# Altium PCB CW308T_S6LX9.PcbDoc
Units mil, origin at the board's own origin, x right, y up, seen from the top; angles counter-clockwise.
Board outline 2060 x 2540 mil, 4 copper layers (Component Side, Ground Plane, Power Plane, Solder Side), stack 33.234 mil thick; 42 components, 46 nets, 324 pads, 120 vias.
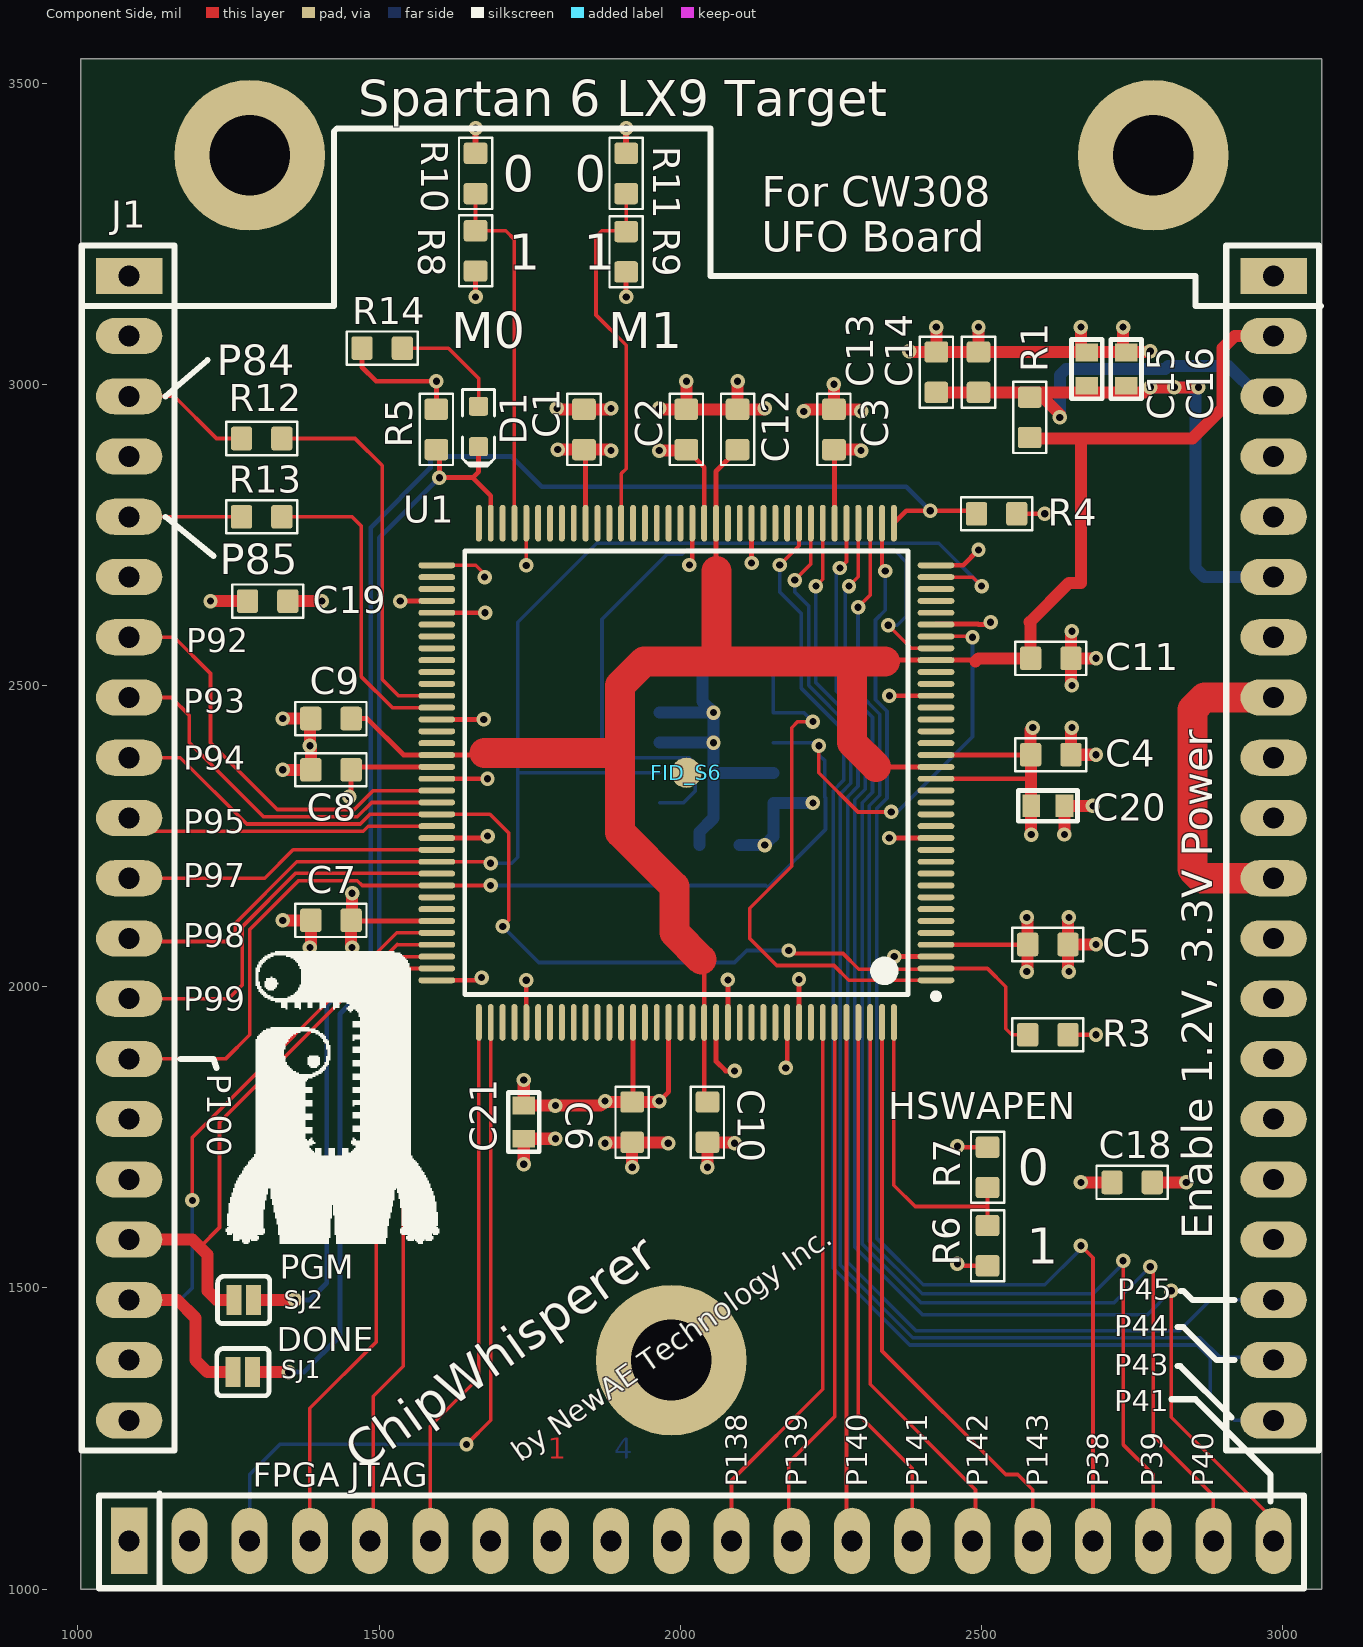
[diagram p0: Component Side view]
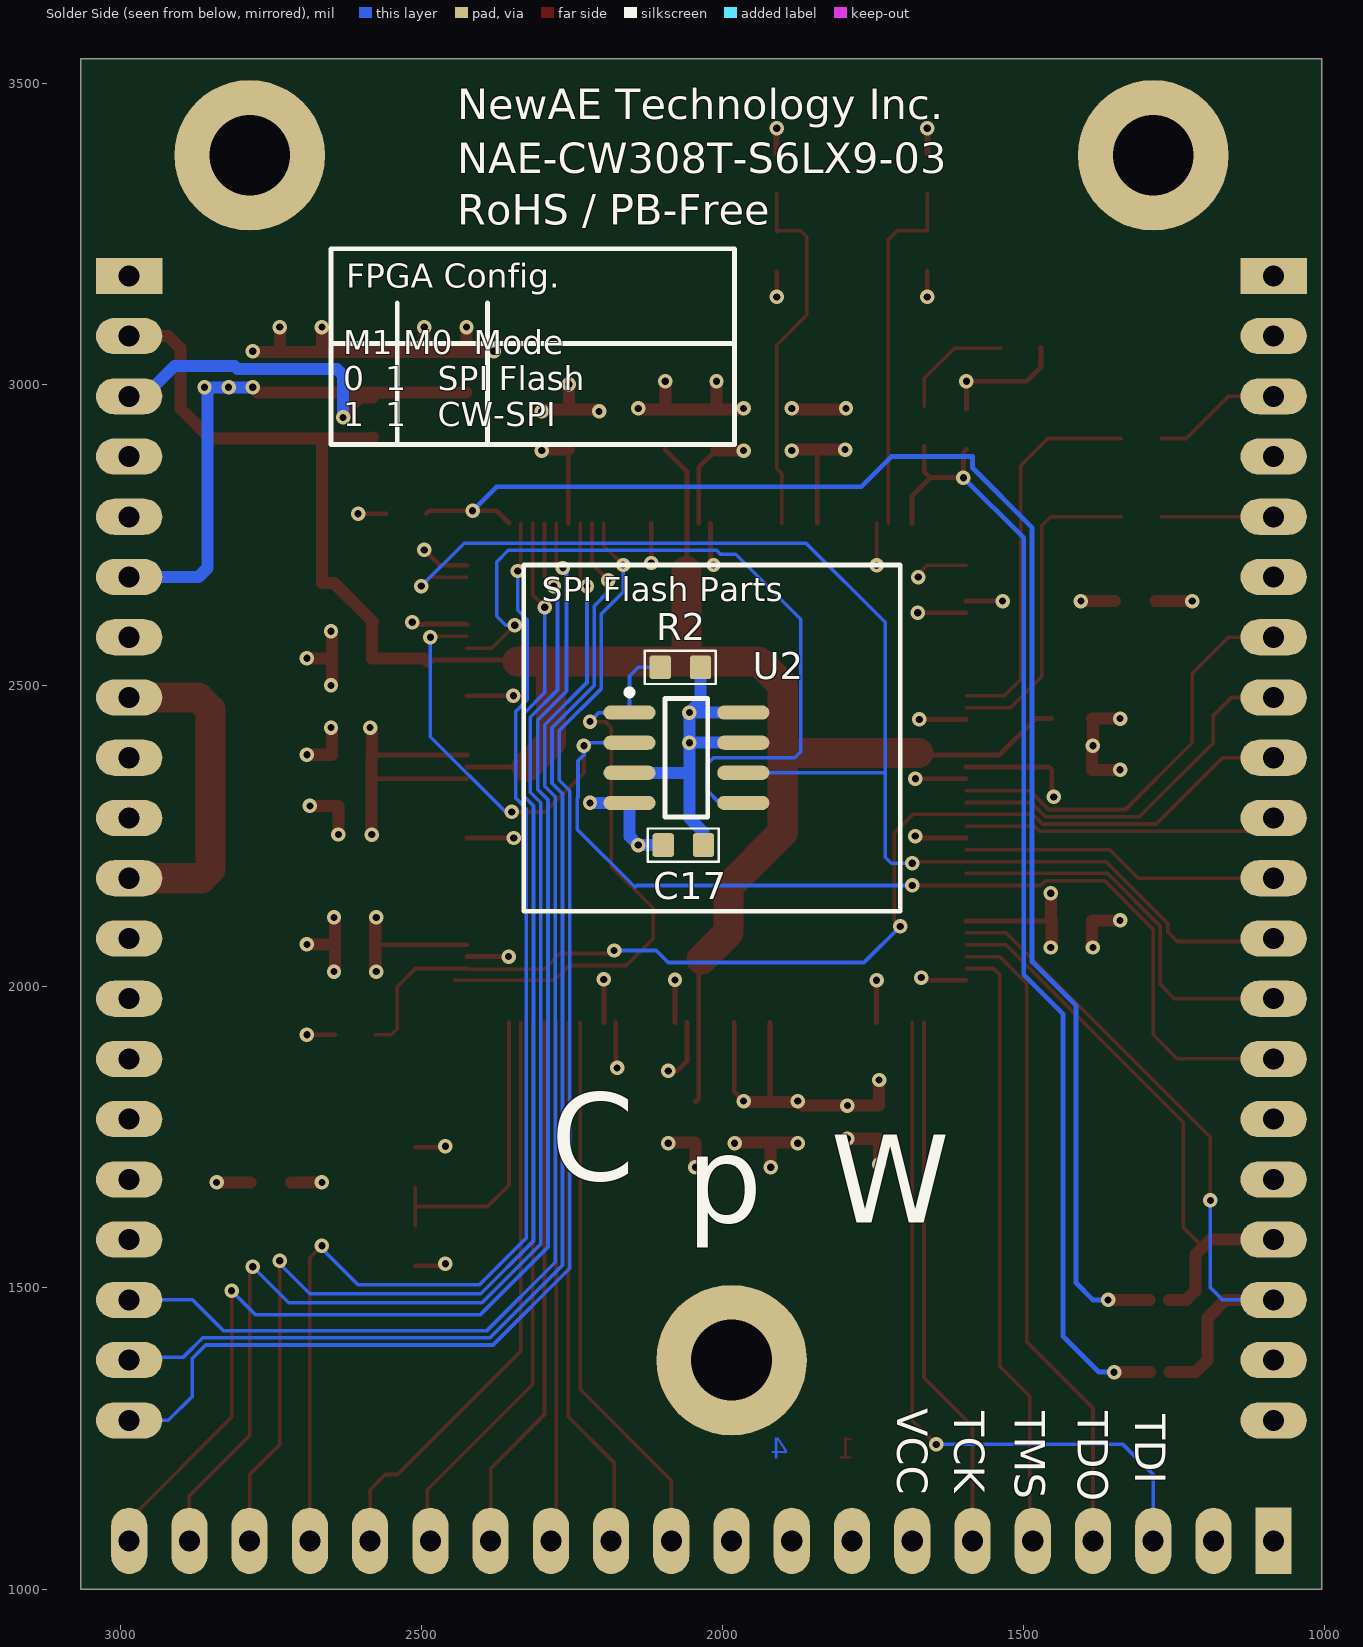
[diagram p1: Solder Side view, seen from below]
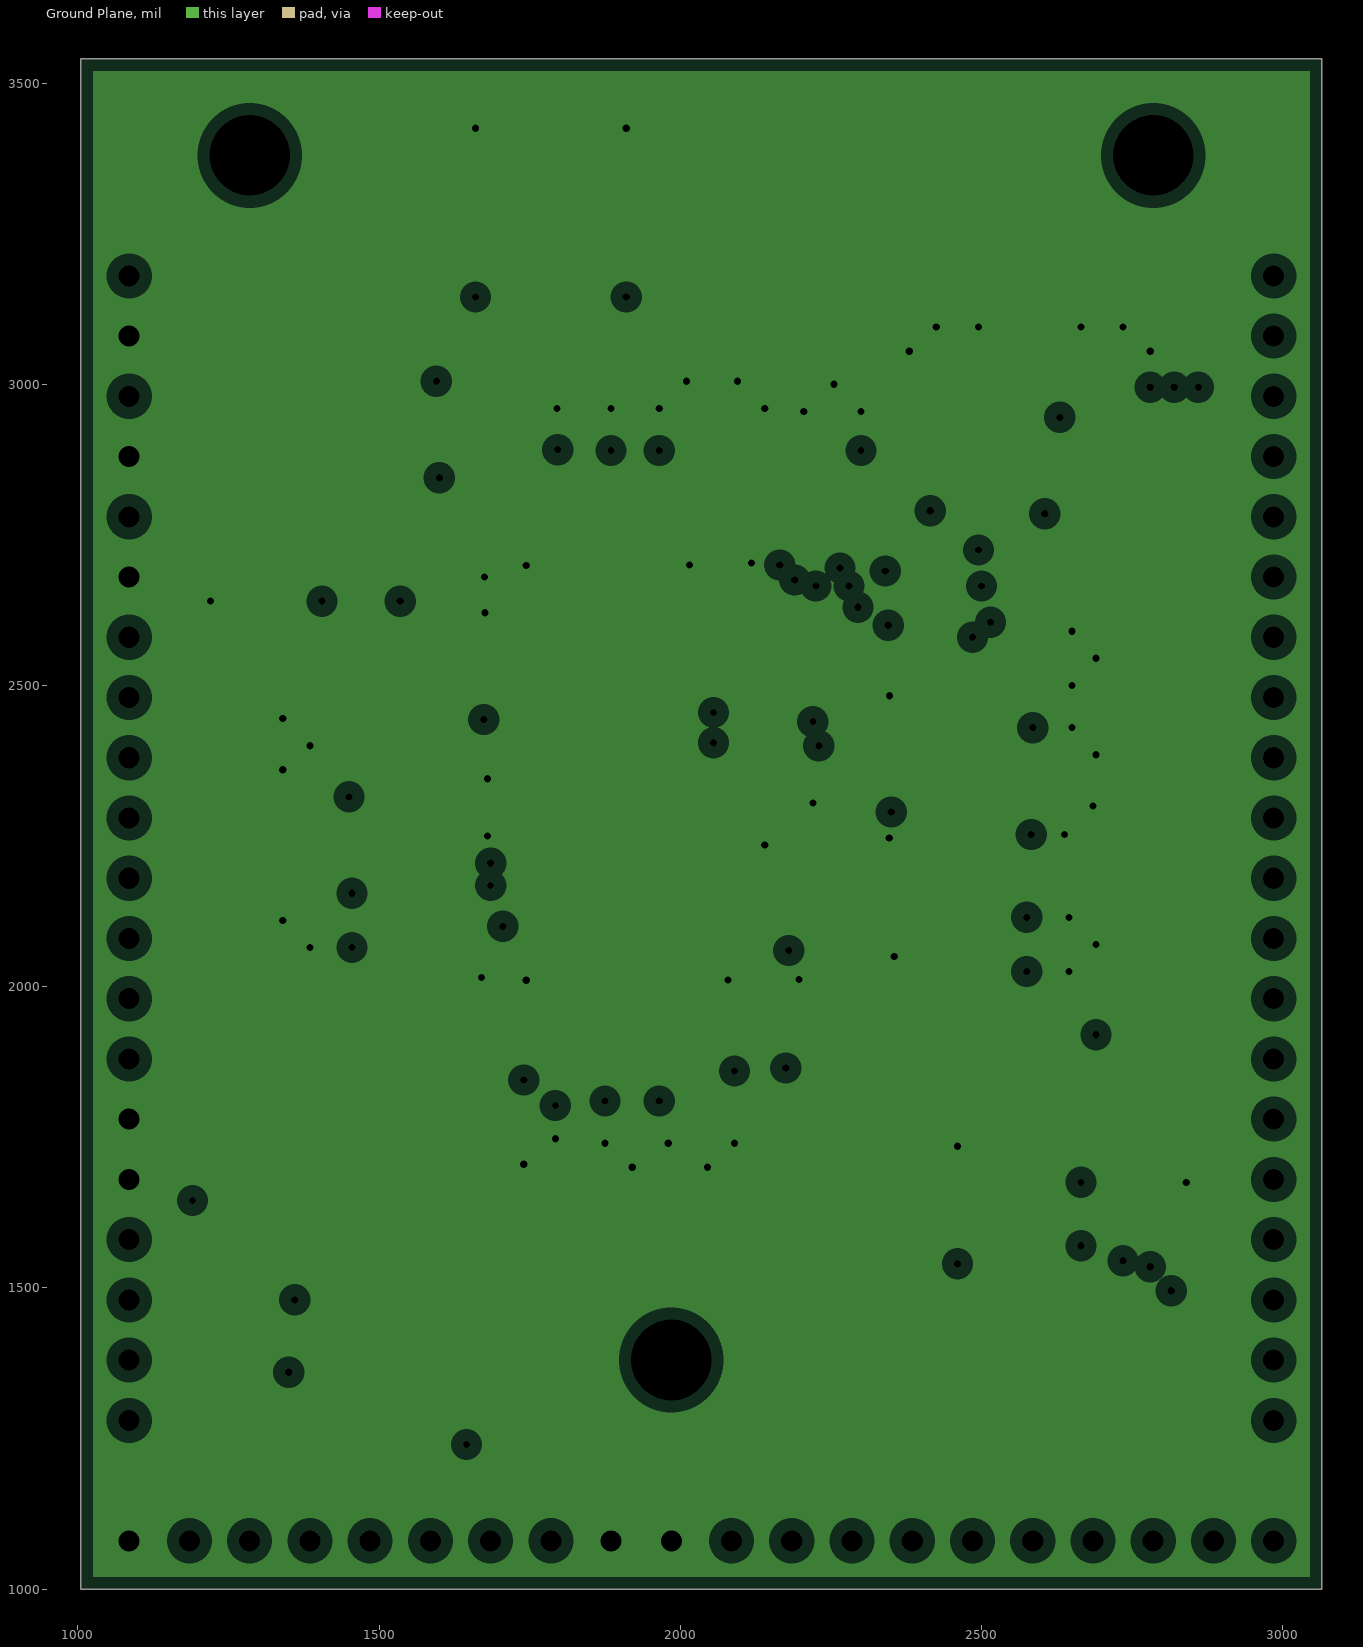
[diagram p2: Ground Plane, clearances drawn from the general rule]
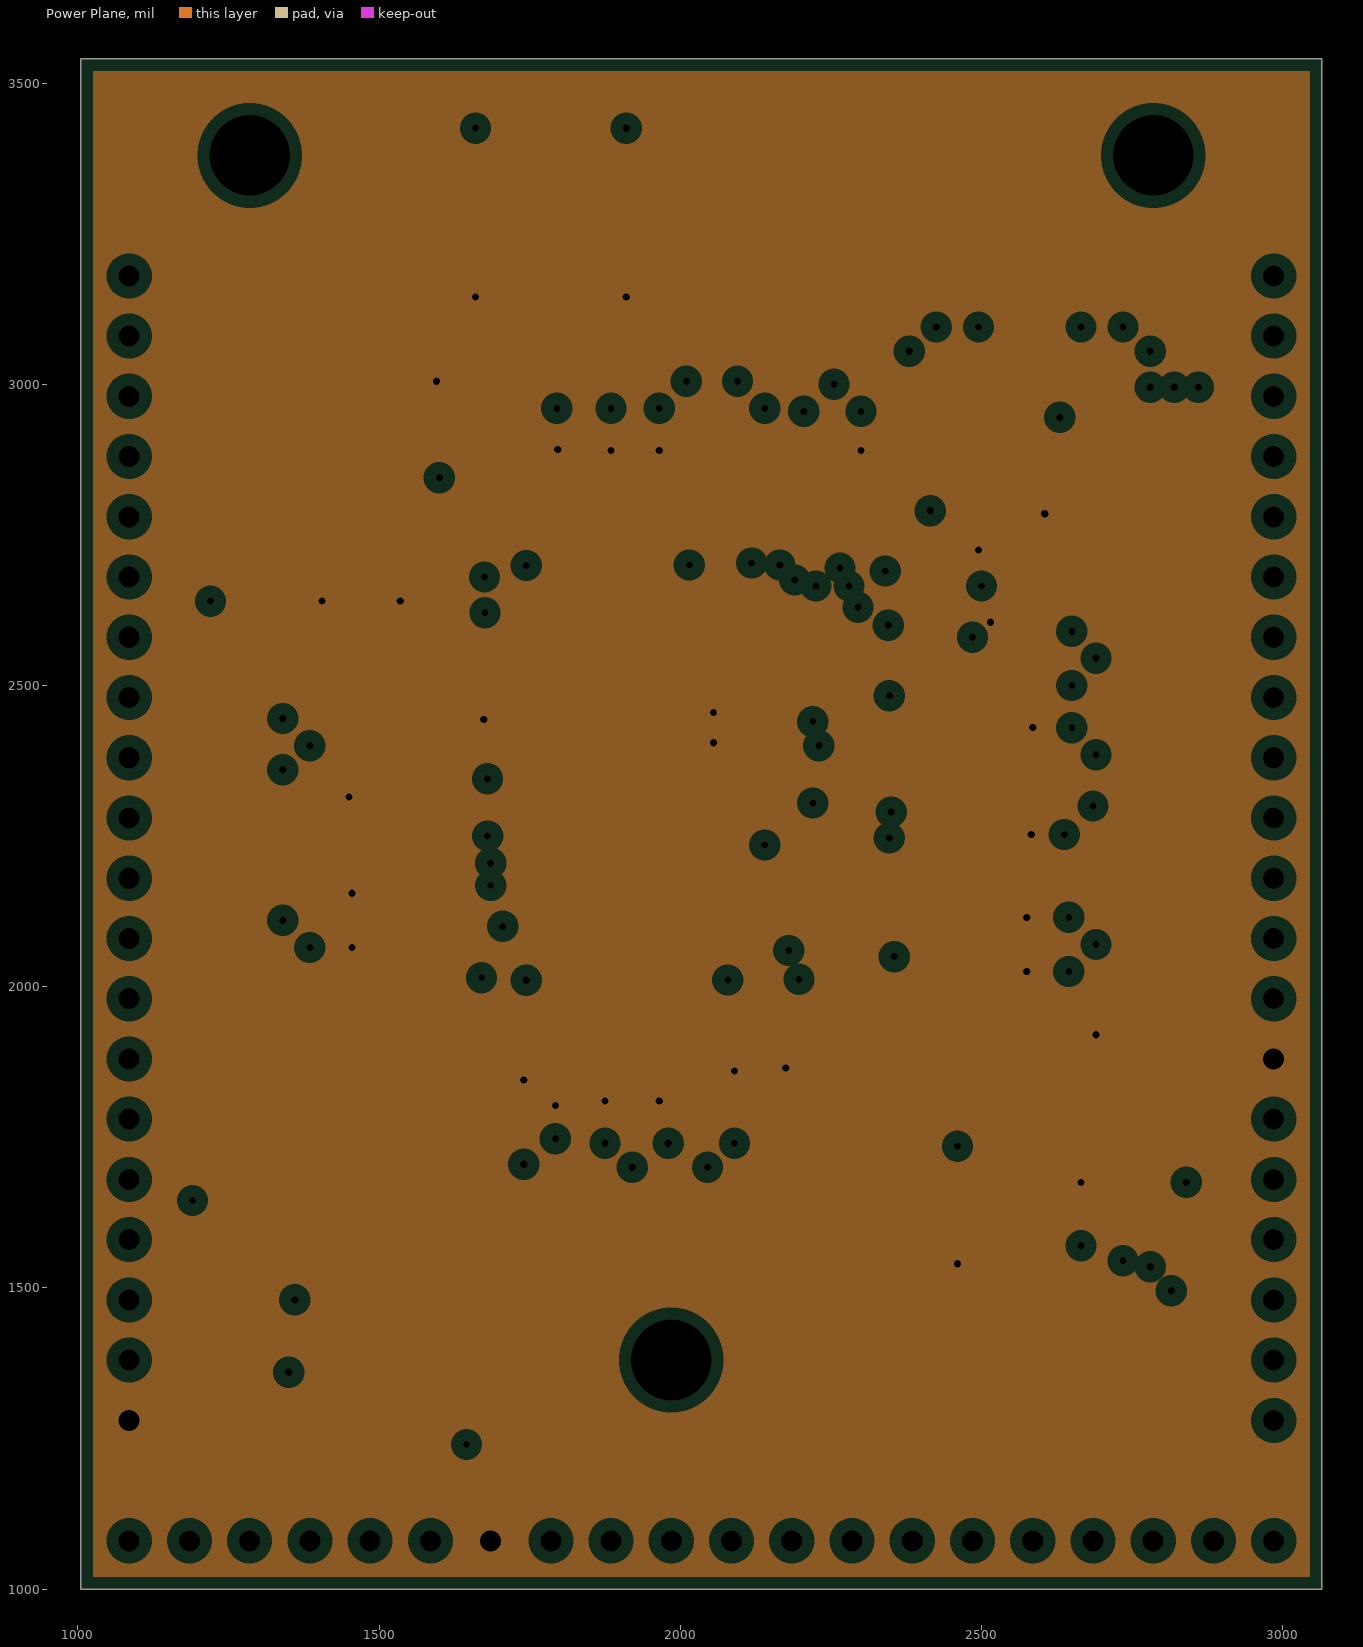
[diagram p3: Power Plane, clearances drawn from the general rule]

## Layer stack, top to bottom
Top Solder: solder mask 0.4, Solder Resist, Dk 3.5
Component Side: signal copper 1.4
Dielectric 1: core 12.6, FR-4, Dk 4.8
Ground Plane: plane copper 1.417, net GND
Dielectric 3: prepreg 5, Dk 4.2
Power Plane: plane copper 1.417, net VCC
Dielectric 4: core 10, Dk 4.2
Solder Side: signal copper 1.4
Bottom Solder: solder mask 0.4, Solder Resist, Dk 3.5

## Board outline
1005,1000 3065,1000 3065,3540 1005,3540

## Design rules (kind name [scope] priority, off if disabled: settings)
Clearance [All] p1: gap=6 ignorepadtopadclearanceinfootprint=FALSE except(0: Arc-Hole Track-Hole SMDPad-Hole THPad-Hole Via-Hole Fill-Hole Poly-Hole Region-Hole Text-Hole)
PasteMaskExpansion PasteMaskExpansion_1 [InComponent('U1')] p1: expansion=-1.5
PasteMaskExpansion [All] p2: expansion=0
PlaneClearance [All] p1: clearance=20
PlaneConnect [All] p1: planeconnectstyle=Relief reliefexpansion=20 reliefentries=4 reliefconductorwidth=10 reliefairgap=10
PolygonConnect [All] p1: connectstyle=Relief reliefconductorwidth=10 reliefentries=4 polygonreliefangle="90 Angle" airgapwidth=10
RoutingVias [All] p1: holewidth=12 width=24 viastyle="Through Hole" minholewidth=12 minwidth=24 maxholewidth=50 maxwidth=100
SolderMaskExpansion [All] p1: expansion=4
Width [All] p1: maxlimit=150 minlimit=6 preferedwidth=8 minimp=50.000000 maximp=50.000000 favimp=50.000000
27 further rules are at their usual default settings.

## Classes and differential pairs
component class CW308T_S6LX9_Connector: J1 R12 R13
component class CW308T_S6LX9_FPGAIO: C17 R2 R3 R6 R7 R8 R9 R10 R11 U1 U2
component class CW308T_S6LX9_FPGAMisc: C1 C2 C3 C4 C5 C6 C7 C8 C9 C10 C11 C12 C13 C14 C15 C16 C18 C19 C20 C21 D1 R1 R4 R5 R14 SJ1 SJ2

## Components (designator, comment, footprint, x,y, rotation, side; value= is the part's Value field where it differs from the comment)
C1 "approved sub OK" CAPC1608X90N 1840,2925 r90 top value=100n
C2 "approved sub OK" CAPC1608X90N 2010,2925 r90 top value=100n
C3 "approved sub OK" CAPC1608X90N 2255,2925 r90 top value=100n
C4 "approved sub OK" CAPC1608X90N 2615,2385 r0 top value=100n
C5 "approved sub OK" CAPC1608X90N 2610,2070 r0 top value=100n
C6 "approved sub OK" CAPC1608X90N 1920,1775 r270 top value=100n
C7 "approved sub OK" CAPC1608X90N 1420,2110 r180 top value=100n
C8 "approved sub OK" CAPC1608X90N 1420,2360 r180 top value=100n
C9 "approved sub OK" CAPC1608X90N 1420,2445 r180 top value=DNM
C10 "approved sub OK" CAPC1608X90N 2045,1775 r270 top value=DNM
C11 "approved sub OK" CAPC1608X90N 2615,2545 r0 top value=DNM
C12 "approved sub OK" CAPC1608X90N 2095,2925 r90 top value=DNM
C13 "approved sub OK" CAPC1608X90N 2495,3020 r90 top value=100n
C14 "approved sub OK" CAPC1608X90N 2425,3020 r90 top value=100n
C15 "2u2" CAPC0603_M 2675,3025 r90 top
C16 "2u2" CAPC0603_M 2740,3025 r90 top
C17 "approved sub OK" CAPC1608X90N 2065,2235 r0 bottom value=100n
C18 "approved sub OK" CAPC1608X90N 2750,1675 r0 top value=100n
C19 "approved sub OK" CAPC1608X90N 1315,2640 r180 top value=100n
C20 "2u2" CAPC0603_M 2610,2300 r0 top
C21 "2u2" CAPC0603_M 1740,1775 r270 top
D1 "LED, 0603, Red" LED-0603-RED 1665,2930 r270 top
FID_S6 "Comment" FIDU-ROUND-1.0mm 2050,2375 r0 top
J1 "CW308_TARGETCON" CW308_TBOARD_CONN 1085,3180 r0 top locked
R1 "Thick Film" RESC1608X55N 2580,2945 r90 top value=3R3
R2 "Thick Film" RESC1608X55N 2070,2530 r0 bottom value=1K
R3 "Thick Film" RESC1608X55N 2610,1920 r180 top value=1K
R4 "Thick Film" RESC1608X55N 2525,2785 r180 top value=1K
R5 "Thick Film" RESC1608X55N 1595,2925 r270 top value=1K
R6 "Thick Film" RESC1608X55N 2510,1570 r90 top value=1K
R7 "Thick Film" RESC1608X55N 2510,1700 r90 top value=1K
R8 "Thick Film" RESC1608X55N 1660,3221.54 r270 top value=1K
R9 "Thick Film" RESC1608X55N 1910,3220 r270 top value=1K
R10 "Thick Film" RESC1608X55N 1660,3350 r270 top value=1K
R11 "Thick Film" RESC1608X55N 1910,3350 r270 top value=1K
R12 "Thick Film" RESC1608X55N 1305,2910 r180 top value=51R
R13 "Thick Film" RESC1608X55N 1305,2780 r180 top value=51R
R14 "330R" RESC1608X55N 1505,3060 r180 top
SJ1 "NC" SJ_2S_NC 1273.78,1360 r0 top
SJ2 "NC" SJ_2S_NC 1275,1480 r0 top
U1 "XC6SLX9-3TQG144" TQG144_L 2010,2355 r180 top
U2 "SST25VF040B-50-4C-SAF-T" MCHP-SOIC-SA8_N 2060,2380 r180 bottom

## Footprints (in the part's own frame and the unit in brackets; to place one, negate y for a bottom-side part, rotate by r counter-clockwise, add the part's x,y. Pads: shape width x height; smd on the part's side, far side on the other; paste and mask are expansions set on the pad)
CAPC0603_M [mm]
  rect 0.75x0.95 smd: 1(-0.7,0) 2(0.7,0)
  silkscreen extent -1.25,-0.65 1.25,0.65, body extent -0.85,-0.45 0.85,0.45, height 0.9
CAPC1608X90N [mm] "Chip Capacitor, Body 1.6x0.8mm, EIA 0603, IPC Medium Density"
  round 0.254 on Mech15: 0(0,0)
  rrect25% 0.9x1 smd: 1(-0.85,0) 2(0.85,0)
  Component Side pour cut-out: -0.6,0.5 -0.4,0.7 0.4,0.7 0.6,0.5 0.6,-0.5 0.4,-0.7 -0.4,-0.7 -0.6,-0.5
  silkscreen extent -1.5,-0.7 1.5,0.7, body extent -0.85,-0.45 0.85,0.45, height 0.89
CW308_TBOARD_CONN [mil]
  rect 110x60 hole 35: A1(0,0) C1(1900,0)
  oval 110x60 hole 35: A2(0,-100) A3(0,-200) A4(0,-300) A5(0,-400) A6(0,-500) A7(0,-600) A8(0,-700) A9(0,-800) A10(0,-900) A11(0,-1000) A12(0,-1100) A13(0,-1200) A14(0,-1300) A15(0,-1400) A16(0,-1500) A17(0,-1600) A18(0,-1700) A19(0,-1800) A20(0,-1900) C2(1900,-100) C3(1900,-200) C4(1900,-300) C5(1900,-400) C6(1900,-500) C7(1900,-600) C8(1900,-700) C9(1900,-800) C10(1900,-900) C11(1900,-1000) C12(1900,-1100) C13(1900,-1200) C14(1900,-1300) C15(1900,-1400) C16(1900,-1500) C17(1900,-1600) C18(1900,-1700) C19(1900,-1800) C20(1900,-1900)
  rect 60x110 hole 35: B1(0,-2100)
  oval 60x110 hole 35: B2(100,-2100) B3(200,-2100) B4(300,-2100) B5(400,-2100) B6(500,-2100) B7(600,-2100) B8(700,-2100) B9(800,-2100) B10(900,-2100) B11(1000,-2100) B12(1100,-2100) B13(1200,-2100) B14(1300,-2100) B15(1400,-2100) B16(1500,-2100) B17(1600,-2100) B18(1700,-2100) B19(1800,-2100) B20(1900,-2100)
  round 250 hole 134: MH1(200,200) MH2(900,-1800) MH2(1700,200)
  silkscreen extent -79,-2179 1979,50, body extent -50,-2150 1950,50, height 224
FIDU-ROUND-1.0mm [mil]
  round 50 smd paste-78.74 mask+27.56: M1(-40,-20)
LED-0603-RED [mm]
  round 0.254 on Mech15: 0(0,0)
  rrect25% 0.8x0.8 smd: A(-0.85,0) K(0.85,0)
  Component Side pour cut-out: -0.5,0.5 0.5,0.5 0.5,-0.5 -0.5,-0.5
  silkscreen extent -1.55,-0.67 1.68,0.67, body extent -0.8,-0.4 0.8,0.4, height 0.75
MCHP-SOIC-SA8_N [mm] "SOIC, 8-Leads, Body 4.9x3.9mm, Pitch 1.27mm, IPC Medium Density"
  oval 2.2x0.6 smd: 1(-2.4,1.905) 2(-2.4,0.635) 3(-2.4,-0.635) 4(-2.4,-1.905) 5(2.4,-1.905) 6(2.4,-0.635) 7(2.4,0.635) 8(2.4,1.905)
  silkscreen extent -2.53,-2.5 0.9,2.88, body extent -2,-2.5 2,2.5, height 1.75
RESC1608X55N [mm] "Chip Resistor, Body 1.6x0.8mm, EIA 0603, IPC Medium Density"
  round 0.254 on Mech15: 0(0,0)
  rrect25% 0.9x1 smd: 1(-0.85,0) 2(0.85,0)
  Component Side pour cut-out: -0.6,0.5 -0.4,0.7 0.4,0.7 0.6,0.5 0.6,-0.5 0.4,-0.7 -0.4,-0.7 -0.6,-0.5
  silkscreen extent -1.5,-0.7 1.5,0.7, body extent -0.87,-0.47 0.88,0.48, height 0.54
SJ_2S_NC [mil] "Solder Jumper, closed with solder paste"
  rect 25x50 smd: 1(-16.22,0) 2(16.22,0)
  silkscreen extent -43,-39 43,39
TQG144_L [mm] "Thin QFP, 144-Leads, Body 20x20mm, Pitch 0.5mm, IPC High Density"
  oval 1.55x0.25 smd: 1(-10.525,8.75) 2(-10.525,8.25) 3(-10.525,7.75) 4(-10.525,7.25) 5(-10.525,6.75) 6(-10.525,6.25) 7(-10.525,5.75) 8(-10.525,5.25) 9(-10.525,4.75) 10(-10.525,4.25) 11(-10.525,3.75) 12(-10.525,3.25) 13(-10.525,2.75) 14(-10.525,2.25) 15(-10.525,1.75) 16(-10.525,1.25) 17(-10.525,0.75) 18(-10.525,0.25) 19(-10.525,-0.25) 20(-10.525,-0.75) 21(-10.525,-1.25) 22(-10.525,-1.75) 23(-10.525,-2.25) 24(-10.525,-2.75) 25(-10.525,-3.25) 26(-10.525,-3.75) 27(-10.525,-4.25) 28(-10.525,-4.75) 29(-10.525,-5.25) 30(-10.525,-5.75) 31(-10.525,-6.25) 32(-10.525,-6.75) 33(-10.525,-7.25) 34(-10.525,-7.75) 35(-10.525,-8.25) 36(-10.525,-8.75) 73(10.525,-8.75) 74(10.525,-8.25) 75(10.525,-7.75) 76(10.525,-7.25) 77(10.525,-6.75) 78(10.525,-6.25) 79(10.525,-5.75) 80(10.525,-5.25) 81(10.525,-4.75) 82(10.525,-4.25) 83(10.525,-3.75) 84(10.525,-3.25) 85(10.525,-2.75) 86(10.525,-2.25) 87(10.525,-1.75) 88(10.525,-1.25) 89(10.525,-0.75) 90(10.525,-0.25) 91(10.525,0.25) 92(10.525,0.75) 93(10.525,1.25) 94(10.525,1.75) 95(10.525,2.25) 96(10.525,2.75) 97(10.525,3.25) 98(10.525,3.75) 99(10.525,4.25) 100(10.525,4.75) 101(10.525,5.25) 102(10.525,5.75) 103(10.525,6.25) 104(10.525,6.75) 105(10.525,7.25) 106(10.525,7.75) 107(10.525,8.25) 108(10.525,8.75)
  oval 0.25x1.55 smd: 37(-8.75,-10.525) 38(-8.25,-10.525) 39(-7.75,-10.525) 40(-7.25,-10.525) 41(-6.75,-10.525) 42(-6.25,-10.525) 43(-5.75,-10.525) 44(-5.25,-10.525) 45(-4.75,-10.525) 46(-4.25,-10.525) 47(-3.75,-10.525) 48(-3.25,-10.525) 49(-2.75,-10.525) 50(-2.25,-10.525) 51(-1.75,-10.525) 52(-1.25,-10.525) 53(-0.75,-10.525) 54(-0.25,-10.525) 55(0.25,-10.525) 56(0.75,-10.525) 57(1.25,-10.525) 58(1.75,-10.525) 59(2.25,-10.525) 60(2.75,-10.525) 61(3.25,-10.525) 62(3.75,-10.525) 63(4.25,-10.525) 64(4.75,-10.525) 65(5.25,-10.525) 66(5.75,-10.525) 67(6.25,-10.525) 68(6.75,-10.525) 69(7.25,-10.525) 70(7.75,-10.525) 71(8.25,-10.525) 72(8.75,-10.525) 109(8.75,10.525) 110(8.25,10.525) 111(7.75,10.525) 112(7.25,10.525) 113(6.75,10.525) 114(6.25,10.525) 115(5.75,10.525) 116(5.25,10.525) 117(4.75,10.525) 118(4.25,10.525) 119(3.75,10.525) 120(3.25,10.525) 121(2.75,10.525) 122(2.25,10.525) 123(1.75,10.525) 124(1.25,10.525) 125(0.75,10.525) 126(0.25,10.525) 127(-0.25,10.525) 128(-0.75,10.525) 129(-1.25,10.525) 130(-1.75,10.525) 131(-2.25,10.525) 132(-2.75,10.525) 133(-3.25,10.525) 134(-3.75,10.525) 135(-4.25,10.525) 136(-4.75,10.525) 137(-5.25,10.525) 138(-5.75,10.525) 139(-6.25,10.525) 140(-6.75,10.525) 141(-7.25,10.525) 142(-7.75,10.525) 143(-8.25,10.525) 144(-8.75,10.525)
  silkscreen extent -10.65,-9.35 9.35,9.55, body extent -10,-10 10,10, height 1.6

## Part data
C1 C2 C3 C4 C5 C6 C7 C8 C9 C10 C11 C12 C13 C14 C17 C18 C19: library part CAPC_100n_0603_X7R_50V_10%, "Capacitor SMD Cer 100nF 10% 50V X7R 0603", Manufacturer 1="AVX Corporation", Manufacturer 2="TDK Corporation", Manufacturer Part Number 1=06035C104KAT2A, Manufacturer Part Number 2=C1608X7R1H104K, Package / Case="0603 (1608 Metric)", Ratings="50V; X7R", Supplier Part Number 1=478-5052-1-ND, Tolerance=±10%, ComponentLink1Description=http://www.avx.com/docs/Catalogs/cx7r.pdf, ComponentLink1URL=http://www.avx.com/docs/Catalogs/cx7r.pdf, ComponentLink2Description=http://product.tdk.com/capacitor/mlcc/en/documents/mlcc_commercial_general_en.pdf, ComponentLink2URL=http://product.tdk.com/capacitor/mlcc/en/documents/mlcc_commercial_general_en.pdf, Material=ceramic, SCDType=spec, Supplier 1=Digi-Key, Supplier 2=Digi-Key, Supplier Part Number 2=445-1314-1-ND
C15 C16 C20 C21: library part CCHIP-2u2-0603, "2u2, 0603", Case-EIA=0603, Case-Metric=1608, Component Group=Capacitor, Component Type=Standard, Mounting Technology=SMT, Part Number=CCHIP-2u2-0603, Pin Count=2
D1: library part LEDCHIP_0603_RED, "Chip LED, Red", Component Group=Optical, Component Type=Standard, Mounting Technology=SMT, Part Number=LEDCHIP_0603_RED, Pin Count=2
FID_S6: library part FIDU-ROUND-1.0MM
J1: library part CW308_TBOARD, "CW308 \"Standard\" Target Board Connector"
R1: library part RES_3R3_0603_5%, "Resistor SMD chip 3.3 Ohm 0.1W 5% 0603", Manufacturer 1=Yageo, Manufacturer Part Number 1=RC0603JR-073R3L, Package / Case="0603 (1608 metric)", Ratings="1/10 W", Supplier Part Number 1=311-3.3GRCT-ND, Tolerance=±5%, ComponentLink1Description=http://www.yageo.com/documents/recent/PYu-RC0603_51_RoHS_L_4.pdf, ComponentLink1URL=http://www.yageo.com/documents/recent/PYu-RC0603_51_RoHS_L_4.pdf, SCDType=spec, Supplier 1=Digi-Key
R2 R3 R4 R5 R6 R7 R8 R9 R10 R11: library part RES_1K_0603_5%, "Resistor SMD chip 1k Ohm 0.1W 5% 0603", Manufacturer 1=Yageo, Manufacturer 2="Vishay Dale", Manufacturer Part Number 1=RC0603JR-071KL, Manufacturer Part Number 2=CRCW06031K00JNEA, Package / Case="0603 (1608 metric)", Ratings="1/10 W", Supplier Part Number 1=311-1.0KGRCT-ND, Tolerance=±5%, ComponentLink1Description=http://www.yageo.com/documents/recent/PYu-RC0603_51_RoHS_L_4.pdf, ComponentLink1URL=http://www.yageo.com/documents/recent/PYu-RC0603_51_RoHS_L_4.pdf, ComponentLink2Description=http://www.vishay.com/doc?20008, ComponentLink2URL=http://www.vishay.com/doc?20008, Material="Thick Film", SCDType=spec, Supplier 1=Digi-Key, Supplier 2=Digi-Key, Supplier Part Number 2=541-1.0KGCT-ND
R12 R13: library part RES_51R_0603_1%, "Resistor SMD chip 51 Ohm 0.1W 1% 0603", Manufacturer 1=Yageo, Manufacturer Part Number 1=RC0603FR-0751RL, Package / Case="0603 (1608 metric)", Ratings="1/10 W", Supplier Part Number 1=311-51.0HRCT-ND, Tolerance=±1%, Material="Thick Film", SCDType=spec, Supplier 1=Digi-Key
R14: library part RCHIP-330R-0603, "330R res, 0603, 1%, 1/10W", Case-EIA=0603, Case-Metric=1608, Manufacture 1=Yageo, Manufacture Part Number 1=RC0603FR-07330RL, Rated Power=0.1W, Rated Voltage=75VDC, Supplier Part Number 1=311-330HRCT-ND, Temperature Range="-55C to 155C", Tolerance=1%, Component Group=Resistor, Component Type=Standard, Mounting Technology=SMT, Part Number=RCHIP-330R-0603, Pin Count=2, Supplier 1=Digi-Key
SJ1 SJ2: library part SJ_2S, "Solder Jumper, NC"
U1: library part CMP-0068-00084-1, "Spartan-6 LX 1.0V FPGA, 102 User I/Os, 144-Pin TQFP (0.5mm Pitch), Low Power Version, Commercial Grade, Pb-Free", Code_JEDEC=MS-026-BFB, DatasheetVersion="ver1.6, Nov-2010", PackageDescription="144-Pin Thin Quad Flat Pack (TQG144) - Pb-Free", PackageReference=TQG144, PackageVersion="ver1.2, Jun-2004", PartId=1
U2: library part CMP-0378-00095-1, "4 Mbit SPI Serial Flash, 2.7 to 3.6 V, 50 MHz, 0 to 70 degC, 8-pin SOIC (SA8), Tape and Reel", Manufacturer=Microchip, Code_JEDEC=MS-012, ComponentLink1Description="Manufacturer URL", ComponentLink1URL=http://www.microchip.com, ComponentLink2Description=Datasheet, ComponentLink2URL=http://ww1.microchip.com/downloads/en/DeviceDoc/25051A.pdf, ComponentLink3Description="Package Specification", ComponentLink3URL=http://ww1.microchip.com/downloads/en/DeviceDoc/25080A.pdf, ComponentLink4Description="Product URL", ComponentLink4URL=http://www.microchip.com/SST25VF040B, DatasheetVersion="Rev. A", Mounting Technology="Surface Mount", PackageDescription="8-Lead Plastic Small Outline, 4.9 x 3.9 mm Body, 1.27 mm Pitch", PackageReference=SOIC-SA8, PackageVersion="Rev. A", PartNumber=SST25VF040B-50-4C-SAF-T

## Via types
v1: diameter 24, hole 12, Component Side to Solder Side, tented both sides, 120 vias

## Nets (pads, with @x,y where several pads share a name; then routed paths per layer and width w, separated by ;. In a path a pad name is that pad's centre, name@x,y a point inside that pad or via, vN(x,y) a via of type N, cw(c..) or ccw(c..) an arc to the next point about the centre after c; other vN are vias at no path point)
CLKIN: R13.1 U1.85 | length 534.8
  Component Side w6: R13.1 1455,2780 1470,2765 1470,2515 1521.73,2463.27 U1.85
CLKOUT: R12.1 U1.84 | length 642
  Component Side w6: R12.1 1460,2910 1505,2865 1505,2510 1532.05,2482.95 U1.84
DONE: J1.A18 SJ1.1 U1.104 | length 1172.7
  Component Side w6: v1(1190,1645) 1190,1750 1529.25,2089.25 U1.104
  Component Side w20: J1.A18 1165,1480 1195,1450 1195,1380 1215,1360 SJ1.1
  Solder Side w6: J1.A18 1170,1480 1190,1500 v1(1190,1645)
GND: C1.2 C2.2 C3.2 C4.2 C5.2 C6.2 C7.2 C8.2 C9.2 C10.2 C11.2 C12.2 C13.2 C14.2 C15.2 C16.2 C17.2 C18.2 C19.2 C20.2 C21.2 J1.A2 J1.A4 J1.A6 J1.A15 J1.A16 J1.B1 J1.B9 J1.B10 R7.2 R10.1 R11.1 U1.3 U1.13 U1.25 U1.49 U1.54 U1.68 U1.73 U1.77 U1.91 U1.96 U1.108 U1.113 U1.130 U1.136 U2.4 | length 3623.9
  Component Side w6: U1.73 1660.51,2699.49 1680,2680 v1(1675,2680) ; v1(1744.25,2699.25) U1.68
  Component Side w8: U1.108 1665.51,2010.51 v1(1670,2015) ; U1.96 1676.73,2246.73 v1(1680,2250) ; U1.91 v1(1679.84,2345.16) ; U1.77 v1(1675.75,2620.75) ; U1.113 v1(1744.25,2010.75) ; v1(2015,2700) 2019.84,2704.84 U1.54 ; U1.130 v1(2078.9,2011.1) ; v1(2118.27,2703.27) U1.49 ; U1.136 v1(2197.01,2012.01) ; v1(2346.73,2246.73) U1.13 ; v1(2347.05,2482.95) U1.25 ; v1(2355.12,2049.88) U1.3 ; v1(2460,1735) 2461.54,1733.46 R7.2
  Component Side w10: R10.1 v1(1660,3425) ; R11.1 v1(1910,3425)
  Component Side w20: v1(1220,2640) C19.2 ; v1(1340,2110) C7.2 1386.54,2066.54 v1(1385,2065) ; v1(1340,2360) C8.2 1386.54,2398.46 v1(1385,2400) 1385,2443.46 C9.2 v1(1340,2445) ; v1(1740,1705) C21.2 v1(1792.56,1747.44) ; v1(1795,2960) 1796.54,2958.46 C1.2 1883.46,2958.46 v1(1885,2960) ; v1(1875,1740) 1876.54,1741.54 C6.2 ; v1(1920,1700) C6.2 ; v1(1965,2960) 1966.54,2958.46 C2.2 ; v1(1980,1740) 1978.46,1741.54 C6.2 ; v1(2010,3005) C2.2 ; v1(2045,1700) C10.2 2088.46,1741.54 v1(2090,1740) ; v1(2095,3005) C12.2 ; v1(2140,2960) 2138.46,2958.46 C12.2 ; v1(2205,2955) 2208.46,2958.46 C3.2 ; v1(2255,3000) C3.2 ; v1(2300,2955) 2296.54,2958.46 C3.2 ; v1(2380,3055) 2381.54,3053.46 C14.2 ; v1(2425,3095) C14.2 ; v1(2495,3095) C13.2 ; v1(2637.56,2252.56) C20.2 v1(2685,2300) ; v1(2645,2025) 2643.46,2026.54 C5.2 ; v1(2645,2115) 2643.46,2113.46 C5.2 ; v1(2650,2430) 2648.46,2428.46 C4.2 v1(2690,2385) ; v1(2650,2500) 2648.46,2501.54 C11.2 ; v1(2650,2590) 2648.46,2588.46 C11.2 ; v1(2665,3095) C15.2@2665,3053.46 ; v1(2690,2070) C5.2 ; v1(2690,2545) C11.2 ; v1(2735,3095) C16.2@2735,3053.46 ; v1(2780,3055) 2778.46,3053.46 C16.2@2735,3053.46 ; C18.2 v1(2840,1675) ; C2.2 C12.2 ; C14.2 C13.2 ; C13.2 C15.2@2665,3053.46 ; C15.2@2665,3053.46 C16.2@2735,3053.46
  Solder Side w20: C17.2 v1(2140,2235) 2154.49,2249.49 U2.4 v1(2220,2305)
GPIO1: J1.A7 U1.92 | length 709.5
  Component Side w6: J1.A7 1160,2580 1220,2520 1220,2405 1331,2294 1458.7,2294 1490.17,2325.47 U1.92
GPIO2: J1.A8 U1.93 | length 628.9
  Component Side w6: J1.A8 1155,2480 1185,2450 1185,2405 1308,2282 1463.67,2282 1487.46,2305.79 U1.93
GPIO3: J1.A9 R3.2 U1.2 U1.94 | length 1859
  Component Side w6: J1.A9 1170,2380 1280,2270 1468.64,2270 1484.74,2286.1 U1.94 1683.9,2286.1 1715,2255 1715,2110 v1(1705,2100) ; v1(2180,2060) 2185,2055 2270,2055 2296.12,2028.88 2423.06,2028.88 U1.2 2509.8,2030.2 2540,2000 2540,1930 2550,1920 R3.2
  Solder Side w6: v1(1705,2100) 1765,2040 2090,2040 2110,2060 v1(2180,2060)
GPIO4: J1.A10 U1.95 | length 523.2
  Component Side w6: J1.A10 1107,2258 1473.61,2258 1482.03,2266.42 U1.95
HDR1: J1.B11 U1.138 | length 923.3
  Component Side w6: J1.B11 2085,1180 2236.38,1331.38 U1.138
HDR2: J1.B12 U1.139 | length 894.2
  Component Side w6: J1.B12 2180,1085 2180,1210 2256.06,1286.06 U1.139
HDR3: J1.B13 U1.140 | length 864.5
  Component Side w6: U1.140 2275.75,1089.25 J1.B13
HDR4: J1.B14 U1.141 | length 897.7
  Component Side w6: U1.141 2295.43,1289.57 2385,1200 J1.B14
HDR5: J1.B15 U1.142 | length 935.1
  Component Side w6: U1.142 2315.12,1339.88 2490,1165 2490,1085 J1.B15
HDR6: J1.B16 U1.143 | length 976
  Component Side w6: U1.143 2334.8,1395.2 2540,1190 2560,1190 2585,1165 J1.B16
HDR7: J1.B17 U1.38 | length 2110.1
  Component Side w6: U1.38 2334.8,2695.2 v1(2340,2690) ; v1(2665,1570) 2685,1550 J1.B17
  Solder Side w6: v1(2340,2690) 2340,2624.7 2324,2608.7 2324,2476.3 2343,2457.3 2343,2312.7 2325.73,2295.43 2325.73,1582.64 2403.37,1505 2605,1505 2660,1560 2660,1565 v1(2665,1570)
HDR8: J1.B18 U1.39 | length 2191.1
  Component Side w6: v1(2295,2630) 2315.12,2650.12 U1.39 ; v1(2735,1545) 2735,1240 2785,1190 J1.B18
  Solder Side w6: v1(2295,2630) 2295,2488.33 2331,2452.33 2331,2317.67 2313.73,2300.4 2313.73,1577.67 2401.4,1490 2685,1490 2735,1540 v1(2735,1545)
HDR9: J1.B19 U1.40 | length 2273.4
  Component Side w6: v1(2280,2665) 2295.43,2680.43 U1.40 ; v1(2780,1535) 2785,1530 2785,1255 2885,1155 J1.B19
  Solder Side w6: v1(2280,2665) 2274,2659 2274,2492.36 2319,2447.36 2319,2322.64 2301.73,2305.37 2301.73,1572.7 2399.43,1475 2720,1475 v1(2780,1535)
HDR10: J1.B20 U1.41 | length 2309.6
  Component Side w6: v1(2265,2695) 2275.75,2705.75 U1.41 ; v1(2815,1495) 2815,1285 2985,1115 J1.B20
  Solder Side w6: v1(2265,2695) 2259,2689 2259,2490.39 2307,2442.39 2307,2327.61 2289.73,2310.34 2289.73,1567.73 2402.46,1455 2775,1455 v1(2815,1495)
LED1: J1.C18 U1.43 | length 2043.3
  Component Side w6: v1(2225,2665) 2236.38,2676.38 U1.43
  Solder Side w6: v1(2225,2665) 2225,2505 2295,2435 2295,2332.58 2277.73,2315.31 2277.73,1542.27 2391,1429 2829,1429 2880,1480 J1.C18
LED2: J1.C19 U1.44 | length 2073.2
  Component Side w6: v1(2190,2675) 2216.69,2701.69 U1.44
  Solder Side w6: v1(2190,2675) 2190,2655 2213,2632 2213,2500.03 2283,2430.03 2283,2337.55 2265.73,2320.28 2265.73,1537.3 2386.03,1417 2863,1417 2895,1385 2980,1385 J1.C19
LED3: J1.C20 U1.45 | length 2174.1
  Component Side w6: v1(2165,2700) 2197.01,2732.01 U1.45
  Solder Side w6: v1(2165,2700) 2165,2655 2201,2619 2201,2495.06 2271,2425.06 2271,2342.52 2253.73,2325.25 2253.73,1532.33 2381.06,1405 2858.03,1405 2880,1383.03 2880,1320 2920,1280 J1.C20
M0: R8.1 R10.2 U1.69 | length 603.2
  Component Side w6: R10.2 R8.1 1710,3255 1724.57,3240.43 U1.69
M1: R9.1 R11.2 U1.60 | length 617.6
  Component Side w6: U1.60 1901.73,2851.73 1910,2860 1910,3065 1860,3115 1860,3245 1870,3255 1908.46,3255 R9.1 R11.2
MISO: J1.A13 U1.99 | length 653.7
  Component Side w6: J1.A13 1250,1980 1273,2003 1273,2099.97 1361.03,2188 1595.31,2188 U1.99
MOSI: J1.A14 U1.30 U1.100 U2.2 | length 2251.5
  Component Side w6: J1.A14 1245,1880 1285,1920 1285,2095 1366,2176 1463.7,2176 1471.71,2167.99 U1.100 v1(1685,2167.99) ; v1(2230,2400) 2230,2355 2295,2290 v1(2350,2290) ; U1.30 2483.62,2581.38 v1(2485,2580)
  Solder Side w6: v1(1685,2167.99) 2142.01,2167.99 2145,2165 2241,2261 2241,2313.7 2240,2314.7 2240,2375 2230,2385 v1(2230,2400) 2225,2405 U2.2 ; v1(2350,2290) 2360,2290 2485,2415 v1(2485,2580)
NetD1_A: D1.A R14.1 | length 193.8
  Component Side w6: R14.1 1615,3060 1665,3010 D1.A
NetD1_K: D1.K R5.2 SJ1.2 U1.71 | length 1910.6
  Component Side w8: R5.2 1600,2886.54 v1(1600,2845) 1655,2845 ; D1.K 1665,2855 1655,2845 ; U1.71 1685.2,2814.8 1655,2845
  Component Side w20: SJ1.2 v1(1350,1360)
  Solder Side w8: v1(1350,1360) 1375,1360 1435,1420 1435,1955 1500,2020 1500,2745 v1(1600,2845)
NetJ1_A3: J1.A3 R12.2 | length 215.5
  Component Side w6: J1.A3 1160,2980 1230,2910 R12.2
NetJ1_A5: J1.A5 R13.2 | length 186.5
  Component Side w6: J1.A5 R13.2
NetJ1_C8: J1.C8 J1.C11 | length 549.5
  Component Side w50: J1.C11 2865,2180 2850,2195 2850,2460 2870,2480 J1.C8
NetR2_2: R2.2 U1.1 U2.1 | length 965.7
  Component Side w6: v1(2220,2440) 2195,2440 2185,2430 2185,2200 2115,2130 2115,2080 2160,2035 2255,2035 2279.49,2010.51 U1.1 U1.1@2444.49,2010.51
  Solder Side w6: R2.2 2140,2530 2154.49,2515.51 U2.1 2205,2455 v1(2220,2440)
NetR4_2: R4.2 SJ2.2 U1.37 | length 2591.6
  Component Side w8: U1.37 2375.12,2790 v1(2415,2790) 2486.54,2790 R4.2
  Component Side w20: SJ2.2 v1(1360,1480)
  Solder Side w8: v1(1360,1480) 1385,1480 1413,1508 1413,1968 1486,2041 1486,2762.11 1585,2861.11 1585,2880 1720,2880 1770,2830 2375,2830 v1(2415,2790)
NetR6_2: R6.2 R7.1 U1.144 | length 503.4
  Component Side w6: U1.144 2354.49,1670.51 2390,1635 2510,1635 ; R6.2 2510,1635 ; R7.1 2510,1635
NetU1_29: U1.29 U2.5 | length 1277.8
  Component Side w6: v1(2345,2600) 2383.31,2561.69 U1.29
  Solder Side w6: U2.5 2005,2305 2025,2325 2025,2370 2015,2380 1880,2380 1870,2390 1870,2610 1978,2718 2003.3,2718 2009.57,2724.27 2355.73,2724.27 2375,2705 2375,2615 2360,2600 v1(2345,2600)
NRST: J1.A11 U1.97 | length 530.1
  Component Side w6: J1.A11 1310,2180 1357.05,2227.05 U1.97
PDIC: U1.101
PDID: U1.102
PROGRAM: J1.A17 SJ2.1 U1.105 | length 954.3
  Component Side w6: 1202.5,1567.5 1235,1600 1235,1775 1530,2070 1530.43,2069.57 U1.105
  Component Side w20: J1.A17 1190,1580 1202.5,1567.5 1215,1555 1215,1495 1230,1480 SJ2.1
SCK: J1.A12 U1.35 U1.98 U2.6 | length 2276.4
  Component Side w6: J1.A12 1090,2075 1245,2075 1261,2091 1261,2104.94 1363.42,2207.36 U1.98 1682.64,2207.36 v1(1685,2205) ; U1.35 2485.2,2679.8 v1(2500,2665)
  Solder Side w6: v1(1685,2205) 1720,2205 1730,2215 1730,2355 ; U2.6 1730,2355 ; v1(2500,2665) 2428.73,2736.27 1861.27,2736.27 1730,2605 1730,2355
SHUNTL: C9.1 C10.1 C11.1 C12.1 J1.C2 R1.1 U1.19 U1.28 U1.52 U1.89 U1.128 | length 3590.7
  Component Side w6: 2035,2045 2039.53,2040.47 ; 2325,2365 2325.16,2364.84
  Component Side w8: C9.1 1480,2445 1540.47,2384.53 U1.89 1671.37,2384.53 ; 1675,2388.16 1671.37,2384.53 ; 1725,2388.16 1721.37,2384.53 1671.37,2384.53 ; 2039.53,2040.47 U1.128 2039.53,1813.94 C10.1 ; 2060,2690 2059.21,2690.79 U1.52 2059.21,2855.75 C12.1 ; 2325.16,2364.84 U1.19 ; 2340,2540 2342.01,2542.01 U1.28 2487.99,2542.01 2490,2540
  Component Side w20: 2490,2540 2495,2545 C11.1 2581.54,2603.46 2580,2605 2645,2670 2665,2670 2665,2905 2660,2910 ; R1.1 2581.54,2910 2660,2910 ; J1.C2 2920,3080 2900,3060 2900,2960 2850,2910 2660,2910
  Component Side w50: 1675,2388.16 1725,2388.16 1900,2388.16 ; 2035,2045 1990,2090 1990,2166.25 1900,2256.25 1900,2388.16 ; 2060,2690 2060,2545 2055,2540 ; 2325,2365 2285,2405 2285,2540 ; 2340,2540 2285,2540 ; 1900,2388.16 1900,2500 1940,2540 2010,2540 2055,2540 ; 2055,2540 2285,2540
TCK: J1.B6 U1.109 | length 894
  Component Side w6: J1.B6 1585,1270 1665.51,1350.51 U1.109
TDI: J1.B3 U1.110 | length 1208
  Component Side w6: v1(1645,1240) 1685.2,1280.2 U1.110
  Solder Side w6: J1.B3 1285,1190 1335,1240 v1(1645,1240)
TDO: J1.B4 U1.106 | length 1089.8
  Component Side w6: J1.B4 1385,1300 1495,1410 1495,2005 1539.88,2049.88 U1.106
TMS: J1.B5 U1.107 | length 1022.6
  Component Side w6: J1.B5 1490,1085 1490,1320 1540,1370 1540,2020 1550.2,2030.2 U1.107
VCC: C1.1 C2.1 C3.1 C4.1 C5.1 C6.1 C7.1 C8.1 C17.1 C18.1 C19.1 C20.1 C21.1 J1.A20 J1.B7 J1.C14 R2.1 R3.1 R4.1 R5.1 R6.1 R8.2 R9.2 R14.2 U1.4 U1.18 U1.20 U1.31 U1.36 U1.42 U1.53 U1.63 U1.76 U1.86 U1.90 U1.103 U1.122 U1.125 U1.129 U1.135 U2.3 U2.7 U2.8 | length 3934.8
  Component Side w6: C1.1 C1.1@1842.68,2888.86
  Component Side w8: v1(1450,2315) 1453.46,2318.46 C8.1 1458.31,2364.84 U1.90 ; C7.1 1454.53,2108.94 U1.103 ; R14.2 1471.54,3028.46 1495,3005 v1(1595,3005) R5.1 ; v1(1535,2640) 1535.43,2640.43 U1.76 ; U1.86 v1(1673.58,2443.58) ; v1(1660,3145) R8.2 ; U1.63 C1.1@1842.68,2888.86 ; v1(1910,3145) R9.2 ; C6.1 1921.42,1809.88 U1.122 ; v1(1965,1810) 1980.47,1825.47 U1.125 ; C2.1 2039.53,2862.01 U1.53 ; U1.129 2059.21,1875.79 2075,1860 v1(2090,1860) ; v1(2175,1865) 2177.32,1867.32 U1.135 ; C3.1 2256.06,2890.47 U1.42 ; U1.4 2576.1,2069.57 C5.1 ; U1.18 2575.16,2345.16 2580,2350 2580,2383.46 C4.1@2581.06,2384.53 ; U1.20 C4.1@2581.06,2384.53 ; U1.31 2425.31,2602 2494.11,2602 2495.05,2601.06 2511.06,2601.06 v1(2515,2605) ; U1.36 2469.49,2699.49 v1(2495,2725) v1@2500,2725 ; v1(2460,1540) 2463.46,1536.54 R6.1 ; R4.1 v1(2605,2785) ; C4.1 C4.1@2581.06,2384.53 ; R3.1 v1(2690,1920)
  Component Side w20: C19.1 v1(1405,2640) ; v1(1455,2065) 1453.46,2066.54 C7.1 1455,2111.54 v1(1455,2155) ; v1(1740,1845) C21.1 v1(1792.56,1802.56) 1867.56,1802.56 v1(1875,1810) 1876.54,1808.46 C6.1 1963.46,1808.46 v1(1965,1810) ; v1(1796.54,2891.54) C1.1 1883.46,2891.54 v1(1885,2890) ; v1(1965,2890) 2008.46,2890 C2.1 ; C3.1 2298.46,2891.54 v1(2300,2890) ; v1(2575,2025) 2576.54,2026.54 C5.1 2576.54,2113.46 v1(2575,2115) ; C4.1@2580,2383.46 2582.44,2381.02 C20.1 v1(2582.44,2252.44) ; C4.1 2581.54,2426.54 v1(2585,2430) ; v1(2665,1675) C18.1
  Solder Side w20: U2.7 v1(2055,2405) ; U2.8 v1(2055,2455) ; C17.1 2031.54,2256.54 2055,2280 2055,2355 ; R2.1 2036.54,2473.46 v1(2055,2455) ; U2.3 2055,2355 ; 2055,2355 v1(2055,2405) ; v1(2055,2405) v1(2055,2455)
VCCINT: C13.1 C14.1 C15.1 C16.1 J1.C3 J1.C6 R1.2 | length 1470.5
  Component Side w20: C14.1 C13.1 2665,2986.54 2735,2986.54 2771.54,2986.54 v1(2780,2995) v1(2820,2995) v1(2860,2995) ; R1.2 2601.54,2978.46 v1@2630,2950
  Solder Side w20: v1(2630,2945) 2630,3015 2640,3025 2805,3025 2810,3030 2910,3030 2960,2980 J1.C3 ; v1(2780,2995) v1(2820,2995) v1(2860,2995) 2855,2990 2855,2695 2870,2680 J1.C6
pads on no net: C1.0 C2.0 C3.0 C4.0 C5.0 C6.0 C7.0 C8.0 C9.0 C10.0 C11.0 C12.0 C13.0 C14.0 C17.0 C18.0 C19.0 D1.0 FID_S6.M1 J1.A1 J1.A19 J1.B2 J1.B8 J1.C1 J1.C4 J1.C5 J1.C7 J1.C9 J1.C10 J1.C12 J1.C13 J1.C15 J1.C16 J1.C17 J1.MH1 J1.MH2 R1.0 R2.0 R3.0 R4.0 R5.0 R6.0 R7.0 R8.0 R9.0 R10.0 R11.0 R12.0 R13.0 R14.0 U1.5 U1.6 U1.7 U1.8 U1.9 U1.10 U1.11 U1.12 U1.14 U1.15 U1.16 U1.17 U1.21 U1.22 U1.23 U1.24 U1.26 U1.27 U1.32 U1.33 U1.34 U1.46 U1.47 U1.48 U1.50 U1.51 U1.55 U1.56 U1.57 U1.58 U1.59 U1.61 U1.62 U1.64 U1.65 U1.66 U1.67 U1.70 U1.72 U1.74 U1.75 U1.78 U1.79 U1.80 U1.81 U1.82 U1.83 U1.87 U1.88 U1.111 U1.112 U1.114 U1.115 U1.116 U1.117 U1.118 U1.119 U1.120 U1.121 U1.123 U1.124 U1.126 U1.127 U1.131 U1.132 U1.133 U1.134 U1.137

## Polygon pours and split planes (outlines as drawn)
GND on Ground Plane (split plane): 3044.9,1020.1 1025.1,1020.1 1025.1,3519.9 3044.9,3519.9
VCC on Power Plane (split plane): 3044.9,1020.1 1025.1,1020.1 1025.1,3519.9 3044.9,3519.9

## Other copper
Component Side:
  text "1" at 1780,1205 h60
Solder Side:
  text "4" at 1890,1205 h60
Ground Plane (plane layer: these items are gaps in the copper):
  text "2" at 1760,1205 h60
Power Plane (plane layer: these items are gaps in the copper):
  text "3" at 1760,1205 h60

## Silkscreen, mask and mechanical layers (free items; w line width, h text height)
Top Overlay:
  drawing of 26 lines, arcs and shapes, not listed
  text "Spartan 6 LX9 Target" at 1465,3445 h60
  text "0" at 1705,3320 h60
  text "0" at 1825,3320 h60
  text "For CW308 / UFO Board" at 2135,3220 h50
  text "1" at 1715,3190 h60
  text "1" at 1840,3190 h60
  text "M0" at 1620,3060 h60
  text "M1" at 1880,3060 h60
  text "P84" at 1230,3015 h50
  text "P85" at 1235,2685 h50
  text "P92" at 1180,2555 h40
  text "P93" at 1175,2455 h40
  text "P94" at 1175,2360 h40
  text "P95" at 1175,2255 h40
  text "P97" at 1175,2165 h40
  text "P98" at 1175,2065 h40
  text "P99" at 1175,1960 h40
  text "P100" at 1215,1855 h40 r270
  text "HSWAPEN" at 2345,1780 h45
  text "0" at 2560,1670 h60
  text "Enable 1.2V, 3.3V Power" at 2883,1581 h50 r90
  text "1" at 2575,1540 h60
  text "PGM" at 1335,1515 h40
  text "P45" at 2725,1480 h35
  text "P44" at 2720,1420 h35
  text "DONE" at 1330,1395 h40
  text "P43" at 2720,1355 h35
  text "P41" at 2720,1295 h35
  text "by NewAE Technology Inc." at 1735,1210 h35 r35.11
  text "ChipWhisperer" at 1470,1195 h60 r35.11
  text "FPGA JTAG" at 1290,1170 h40
  text "P138" at 2110,1170 h35 r90
  text "P139" at 2210,1170 h35 r90
  text "P140" at 2310,1170 h35 r90
  text "P141" at 2410,1170 h35 r90
  text "P142" at 2510,1170 h35 r90
  text "P143" at 2610,1170 h35 r90
  text "P38" at 2710,1170 h35 r90
  text "P39" at 2800,1170 h35 r90
  text "P40" at 2885,1170 h35 r90
Bottom Overlay:
  lines w7.87: 1980,3067.5 2650,3067.5 ; 2390,2900 2390,3135 ; 2540,3135 2540,2900 2545,2900 ; 1705,2125 1705,2700 2330,2700 2330,2125 1705,2125 ; 1980,2900 1980,3225 2650,3225 2650,2900 1980,2900
  text "NewAE Technology Inc." at 2440,3440 h50
  text "NAE-CW308T-S6LX9-03" at 2440,3350 h50
  text "RoHS / PB-Free" at 2440,3265 h50
  text "FPGA Config." at 2625,3160 h40
  text "M1 M0  Mode / 0  1   SPI Flash / 1  1   CW-SPI" at 2630,2930 h40
  text "SPI Flash Parts" at 2300,2640 h40
  text "C" at 2285,1630 h250
  text "W" at 1820,1560 h250
  text "p" at 2060,1560 h250
  text "VCC" at 1710,1300 h50 r90
  text "TDO" at 1410,1295 h50 r90
  text "TMS" at 1515,1295 h50 r90
  text "TCK" at 1615,1295 h50 r90
  text "TDI" at 1315,1290 h50 r90
Mechanical 1:
  the board outline again, w10